# Altium PCB PCB1.PcbDoc
Units mm, origin at the board's own origin, x right, y up, seen from the top; angles counter-clockwise.
Board outline 21.08 x 42.55 mm, 2 copper layers (Top Layer, Bottom Layer); 17 components, 8 nets, 141 pads, 0 vias.
Unrouted connection lines stored in the file: 16.
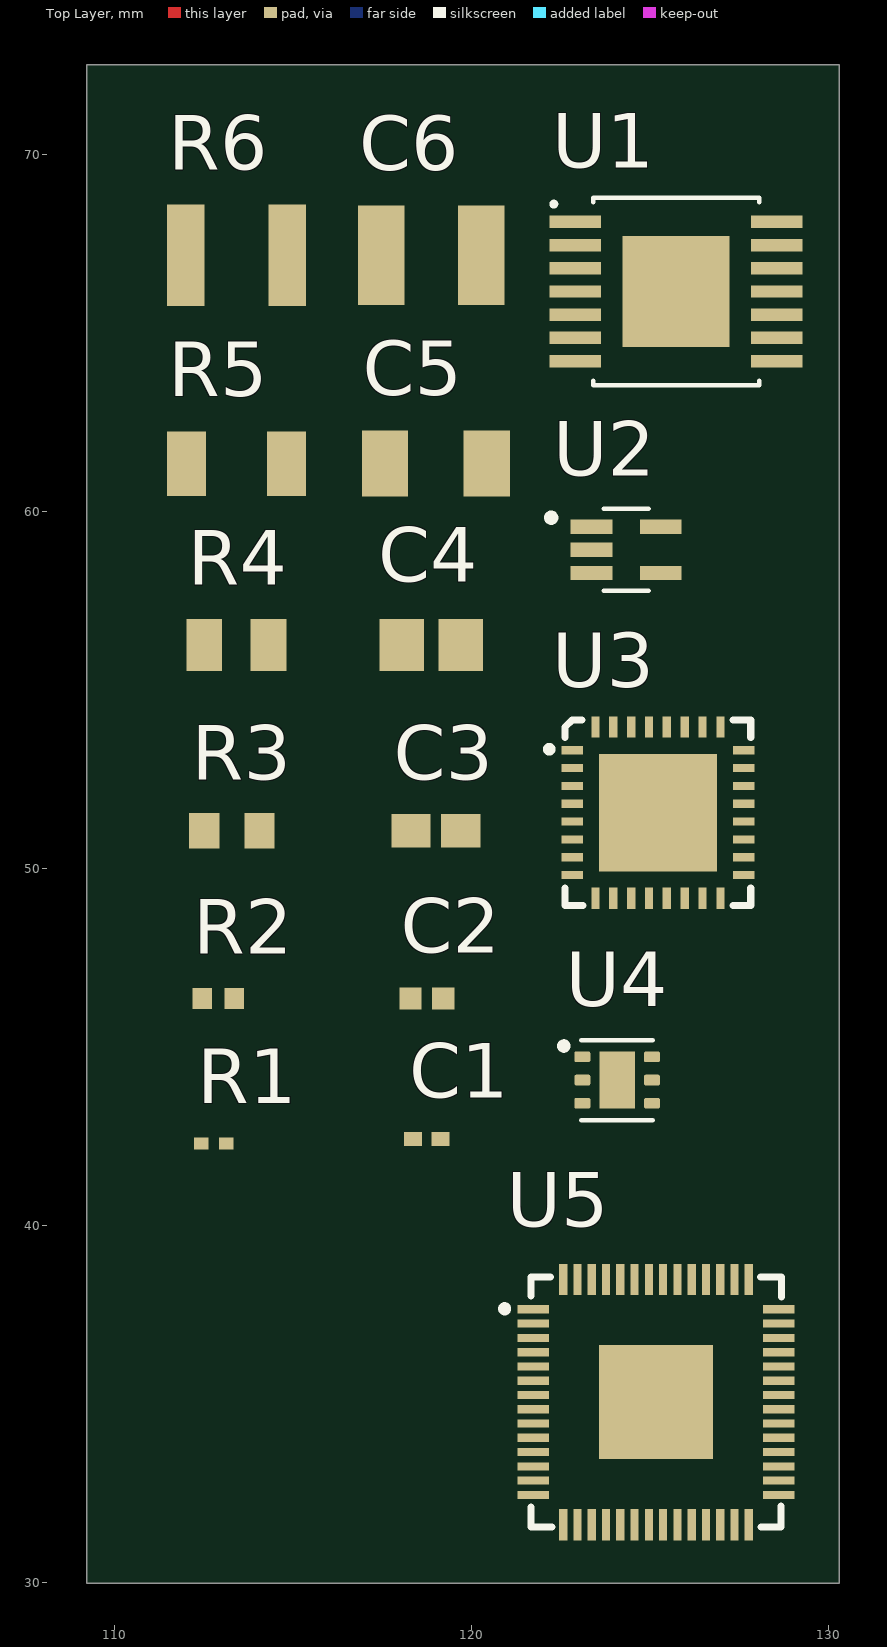
[diagram p0: Top Layer view]
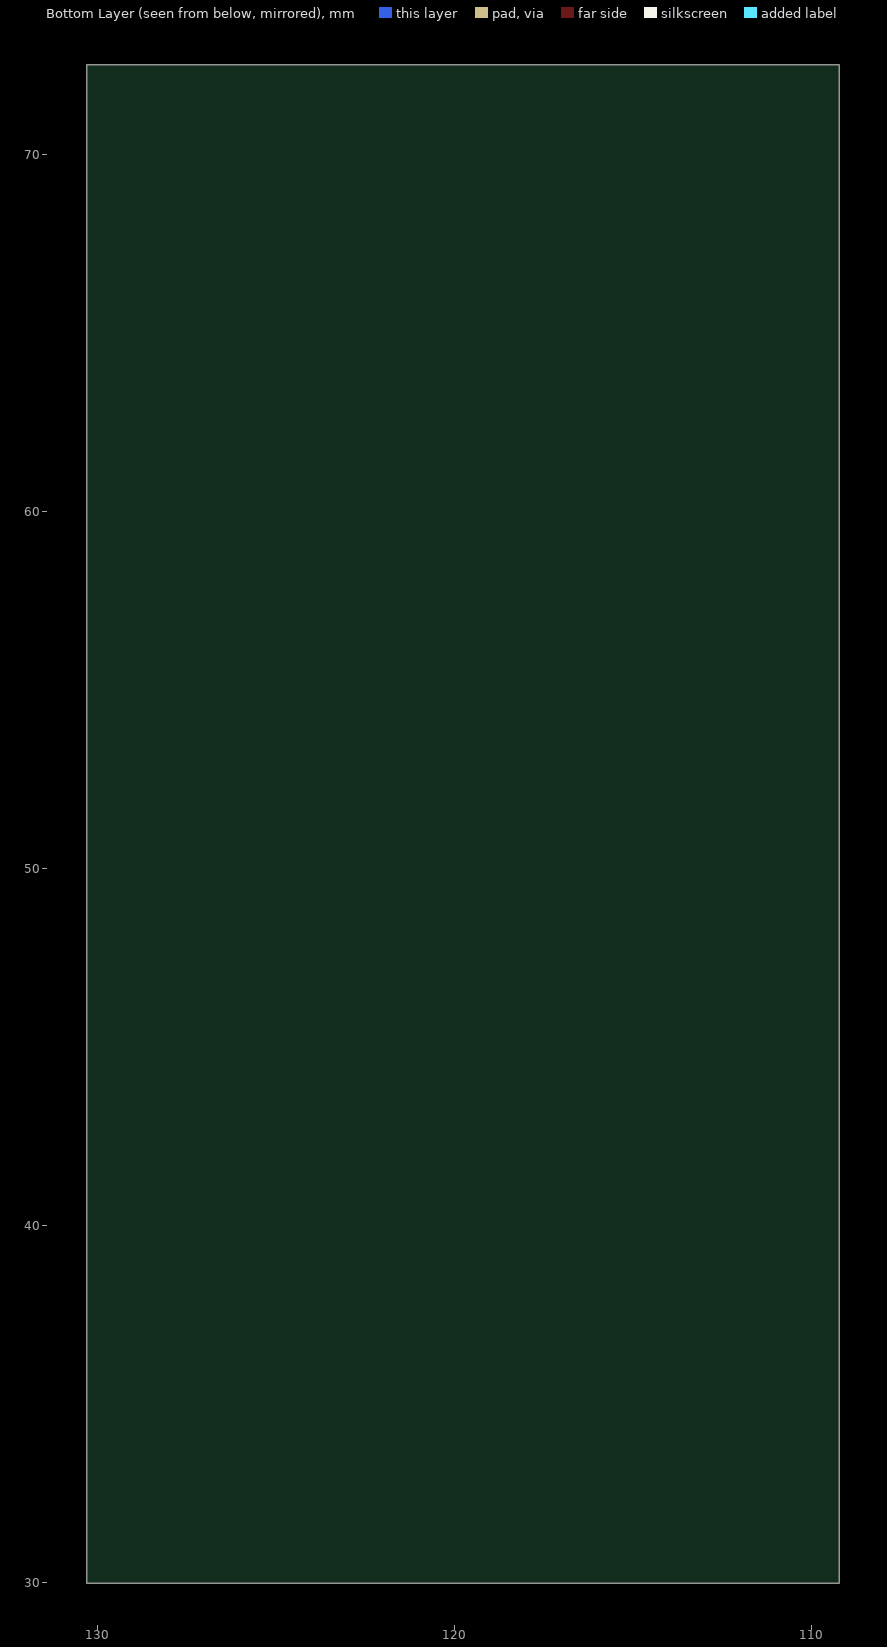
[diagram p1: Bottom Layer view, seen from below]

## Layer stack, top to bottom
Top Solder: solder mask 0.0102, Solder Resist, Dk 3.5
Top Layer: signal copper 0.0356
Dielectric 1: dielectric 0.32, FR-4, Dk 4.8
Bottom Layer: signal copper 0.0356
Bottom Solder: solder mask 0.0102, Solder Resist, Dk 3.5

## Board outline
109.22,29.972 130.302,29.972 130.302,72.517 109.22,72.517

## Design rules (kind name [scope] priority, off if disabled: settings)
Clearance "Stitching No Net" [IsStitchingVia and InNet('No Net') vs (IsVia and (Not IsStitchingVia)) Or IsPad] p1: gap=0.127 ignorepadtopadclearanceinfootprint=FALSE
Clearance [All] p2: gap=0.2 ignorepadtopadclearanceinfootprint=TRUE except(0.102: Arc-Text Track-Text SMDPad-Text THPad-Text Fill-Text Poly-Text Region-Text Text-Text; 0.114: Arc-Arc Arc-Track Arc-SMDPad Arc-Via Track-Track Track-SMDPad Track-Via; 0.127: Via-Text; 0.152: Arc-THPad Track-THPad SMDPad-SMDPad SMDPad-THPad SMDPad-Via THPad-THPad THPad-Via Via-Via; 0.25: Arc-Hole Track-Hole SMDPad-Hole THPad-Hole Via-Hole Fill-Hole Poly-Hole Region-Hole Text-Hole)
ComponentClearance [All] p1: gap=0 collisioncheckmode=3 verticalgap=0 showdistances=FALSE
DiffPairsRouting DIFF90 [InDifferentialPairClass('All Differential Pairs')] p1: maxlimit=0.15 minlimit=0.15 mostfreqgap=0.15 toplayer_minwidth=0.141 toplayer_maxwidth=0.141 toplayer_prefwidth=0.141 bottomlayer_minwidth=0.137 bottomlayer_maxwidth=0.137 bottomlayer_prefwidth=0.137 impedanceprofiledriven=TRUE impedanceprofileid={235DA661-18AF-4E37-B827-B8E0859B5AF9} maxuncoupledlength=12.7
HoleSize [All] p1: absolutevalues=TRUE maxlimit=6.3 minlimit=0.2 maxpercent=80.000 minpercent=20.000
MinimumSolderMaskSliver [All] p1: minsoldermaskwidth=0.08
PlaneConnect [All] p1: pad.planeconnectstyle=Relief pad.reliefexpansion=0.508 pad.reliefentries=4 pad.reliefconductorwidth=0.508 pad.reliefairgap=0.254 via.planeconnectstyle=Direct via.reliefexpansion=0.508 via.reliefentries=4 via.reliefconductorwidth=0.508 via.reliefairgap=0.254
PolygonConnect [All] p1: connectstyle=Direct reliefconductorwidth=0.254 reliefentries=4 polygonreliefangle="90 Angle" airgapwidth=0.254
RoutingVias "General Vias" [All] p1: holewidth=0.2 width=0.45 viastyle="Through Hole" minholewidth=0.2 minwidth=0.45 maxholewidth=0.5 maxwidth=6.3
SilkToSilkClearance [All] p1: silktosilkclearance=0.15
SilkToSolderMaskClearance [IsPad] p1: minsilkscreentomaskgap=0.14 clearancetoexposedcopper=TRUE
SolderMaskExpansion [All] p1: expansion=0.038 istentingtop=FALSE
SupplyNets "Schematic Supply Nets" [InNet('GND')] p1: voltage=0.000
SupplyNets "Schematic Supply Nets_2" [InNet('VCC')] p2: voltage=0.000
UnRoutedNet [All] p1: checkbadconnections=TRUE
Width [All] p1: maxlimit=5 minlimit=0.1 preferedwidth=0.25
22 further rules are at their usual default settings.

## Components (designator, comment, footprint, x,y, rotation, side; value= is the part's Value field where it differs from the comment)
C1 "CAP_0201" CAP_0201 118.745,42.418 r0 top
C2 "CAP_0402" CAP_0402 118.745,46.355 r0 top
C3 "CAP_0603" CAP_0603 118.999,51.054 r0 top
C4 "CAP_0805" CAP_0805 118.872,56.261 r0 top
C5 "CAP_1206" CAP_1206 118.999,61.341 r0 top
C6 "CAP_1210" CAP_1210 118.872,67.183 r0 top
R1 "RES_0201" RES_0201 112.776,42.291 r0 top
R2 "RES_0402" RES_0402 112.903,46.355 r0 top
R3 "RES_0603" RES_0603 113.284,51.054 r0 top
R4 "RES_0805" RES_0805 113.411,56.261 r0 top
R5 "RES_1206" RES_1206 113.411,61.341 r0 top
R6 "RES_1210" RES_1210 113.411,67.183 r0 top
U1 "ISL78420AVEZ" ISL78420AVEZ 125.73,66.167 r0 top
U2 "MIC5365-1.8YC5-TR" MIC5365-1.8YC5-TR 124.333,58.928 r0 top
U3 "ISL6236AIRZ" L32.5X5B 125.222,51.562 r0 top
U4 "TLV75533PDRVR" TLV75533PDRVR 124.079,44.069 r0 top
U5 "RP2040" QFN-56-EP 125.168,35.044 r0 top

## Footprints (in the part's own frame and the unit in brackets; to place one, negate y for a bottom-side part, rotate by r counter-clockwise, add the part's x,y. Pads: shape width x height; smd on the part's side, far side on the other; paste and mask are expansions set on the pad)
CAP_0201 [mm] "Chip Capacitor, 2-Leads, Body 0.60x0.30mm, IPC Medium Density"
  rect 0.5x0.4 smd mask+0.05: 1(-0.386,0) 2(0.386,0)
  body extent -0.32,-0.17 0.32,0.17, height 0.33
CAP_0402 [mm] "Chip Capacitor, 2-Leads, Body 1.00x0.50mm, IPC Medium Density"
  rect 0.62x0.62 smd mask+0.05: 1(-0.46,0) 2(0.46,0)
  body extent -0.53,-0.28 0.53,0.28, height 0.55
CAP_0603 [mm] "Chip Capacitor, 2-Leads, Body 1.60x0.80mm, IPC Medium Density"
  rect 1.1x0.95 smd mask+0.05: 1(-0.7,0) 2(0.7,0)
  body extent -0.85,-0.44 0.85,0.44, height 0.87
CAP_0805 [mm] "Chip Capacitor, 2-Leads, Body 2.00x1.25mm, IPC Medium Density"
  rect 1.25x1.45 smd mask+0.05: 1(-0.825,0) 2(0.825,0)
  body extent -1.05,-0.67 1.05,0.67, height 1.35
CAP_1206 [mm] "Chip Capacitor, 2-Leads, Body 3.20x1.60mm, IPC Medium Density"
  rect 1.3x1.85 smd mask+0.05: 1(-1.425,0) 2(1.425,0)
  body extent -1.68,-0.87 1.68,0.87, height 1.35
CAP_1210 [mm] "Chip Capacitor, 2-Leads, Body 3.20x2.50mm, IPC Medium Density"
  rect 1.3x2.8 smd mask+0.05: 1(-1.4,0) 2(1.4,0)
  body extent -1.7,-1.35 1.7,1.35, height 1.8
ISL78420AVEZ [mm]
  rect 1.45x0.35 smd paste+0 mask+0.05: 1(-2.825,1.95) 2(-2.825,1.3) 3(-2.825,0.65) 4(-2.825,0) 5(-2.825,-0.65) 6(-2.825,-1.3) 7(-2.825,-1.95) 8(2.825,-1.95) 9(2.825,-1.3) 10(2.825,-0.65) 11(2.825,0) 12(2.825,0.65) 13(2.825,1.3) 14(2.825,1.95)
  rect 3x3.1 smd paste+0 mask+0.05: 15(0,0)
  silkscreen extent -3.49,-2.63 2.32,2.63, body extent -3.2,-2.5 3.2,2.5, height 1.2
L32.5X5B [mm]
  rect 0.6x0.23 smd mask+0.05: 1(-2.4,1.75) 2(-2.4,1.25) 3(-2.4,0.75) 4(-2.4,0.25) 5(-2.4,-0.25) 6(-2.4,-0.75) 7(-2.4,-1.25) 8(-2.4,-1.75) 17(2.4,-1.75) 18(2.4,-1.25) 19(2.4,-0.75) 20(2.4,-0.25) 21(2.4,0.25) 22(2.4,0.75) 23(2.4,1.25) 24(2.4,1.75)
  rect 0.23x0.6 smd mask+0.05: 9(-1.75,-2.4) 10(-1.25,-2.4) 11(-0.75,-2.4) 12(-0.25,-2.4) 13(0.25,-2.4) 14(0.75,-2.4) 15(1.25,-2.4) 16(1.75,-2.4) 25(1.75,2.4) 26(1.25,2.4) 27(0.75,2.4) 28(0.25,2.4) 29(-0.25,2.4) 30(-0.75,2.4) 31(-1.25,2.4) 32(-1.75,2.4)
  rect 3.3x3.3 smd mask+0.05: 33(0,0)
  silkscreen extent -3.1,-2.6 2.6,2.6, body extent -2.55,-2.55 2.55,2.55, height 1
MIC5365-1.8YC5-TR [mm]
  rect 1.17x0.4 smd mask+0.05: 1(-0.97,0.65) 2(-0.97,0) 3(-0.97,-0.65) 4(0.97,-0.65) 5(0.97,0.65)
  silkscreen extent -2.2,-1.14 0.63,1.14, body extent -1.05,-1 1.05,1, height 1.1
QFN-56-EP [mm]
  rect 0.875x0.23 smd mask+0.05: 1(-3.437,2.6) 2(-3.437,2.2) 3(-3.437,1.8) 4(-3.437,1.4) 5(-3.437,1) 6(-3.437,0.6) 7(-3.437,0.2) 8(-3.437,-0.2) 9(-3.437,-0.6) 10(-3.437,-1) 11(-3.437,-1.4) 12(-3.437,-1.8) 13(-3.437,-2.2) 14(-3.437,-2.6) 29(3.437,-2.6) 30(3.437,-2.2) 31(3.437,-1.8) 32(3.437,-1.4) 33(3.437,-1) 34(3.437,-0.6) 35(3.437,-0.2) 36(3.437,0.2) 37(3.437,0.6) 38(3.437,1) 39(3.437,1.4) 40(3.437,1.8) 41(3.437,2.2) 42(3.437,2.6)
  rect 0.23x0.875 smd mask+0.05: 15(-2.6,-3.437) 16(-2.2,-3.437) 17(-1.8,-3.437) 18(-1.4,-3.437) 19(-1,-3.437) 20(-0.6,-3.437) 21(-0.2,-3.437) 22(0.2,-3.437) 23(0.6,-3.437) 24(1,-3.437) 25(1.4,-3.437) 26(1.8,-3.437) 27(2.2,-3.437) 28(2.6,-3.437) 43(2.6,3.437) 44(2.2,3.437) 45(1.8,3.437) 46(1.4,3.437) 47(1,3.437) 48(0.6,3.437) 49(0.2,3.437) 50(-0.2,3.437) 51(-0.6,3.437) 52(-1,3.437) 53(-1.4,3.437) 54(-1.8,3.437) 55(-2.2,3.437) 56(-2.6,3.437)
  rect 3.2x3.2 smd mask+0.05: 57(0,0)
  silkscreen extent -4.3,-3.5 3.51,3.51, body extent -3.51,-3.51 3.51,3.51, height 1
RES_0201 [mm] "Chip Resistor, 2-Leads, Body 0.60x0.30mm, IPC Medium Density"
  rect 0.4x0.35 smd mask+0.05: 1(-0.35,0) 2(0.35,0)
  body extent -0.32,-0.17 0.32,0.17, height 0.26
RES_0402 [mm] "Chip Resistor, 2-Leads, Body 1.00x0.50mm, IPC Medium Density"
  rect 0.55x0.6 smd mask+0.05: 1(-0.45,0) 2(0.45,0)
  body extent -0.53,-0.28 0.53,0.28, height 0.4
RES_0603 [mm] "Chip Resistor, 2-Leads, Body 1.60x0.80mm, IPC Medium Density"
  rect 0.85x1 smd mask+0.05: 1(-0.775,0) 2(0.775,0)
  body extent -0.85,-0.45 0.85,0.45, height 0.55
RES_0805 [mm] "Chip Resistor, 2-Leads, Body 2.00x1.25mm, IPC Medium Density"
  rect 1x1.45 smd mask+0.05: 1(-0.9,0) 2(0.9,0)
  body extent -1.05,-0.67 1.05,0.67, height 0.6
RES_1206 [mm] "Chip Resistor, 2-Leads, Body 3.10x1.60mm, IPC Medium Density"
  rect 1.1x1.8 smd mask+0.05: 1(-1.4,0) 2(1.4,0)
  body extent -1.6,-0.85 1.6,0.85, height 0.65
RES_1210 [mm] "Chip Resistor, 2-Leads, Body 3.10x2.60mm, IPC Medium Density"
  rect 1.05x2.85 smd mask+0.05: 1(-1.425,0) 2(1.425,0)
  body extent -1.6,-1.38 1.6,1.38, height 0.65
TLV75533PDRVR [mm]
  rrect35% 0.45x0.3 smd mask+0.05: 1(-0.975,0.65) 2(-0.975,0) 3(-0.975,-0.65) 4(0.975,-0.65) 5(0.975,0) 6(0.975,0.65)
  rect 1x1.6 smd paste-2 mask+0.05: 7(0,0)
  silkscreen extent -1.58,-1.12 1,1.12, body extent -1,-1 1,1, height 0.8

## Part data
C1: "Capacitor SMD 0201 Generic"
C2: "Capacitor SMD 0402 Generic"
C3: "Capacitor SMD 0603 Generic"
C4: "Capacitor SMD 0805 Generic"
C5: "Capacitor SMD 1206 Generic"
C6: "Capacitor SMD 1210 Generic"
R1: "Resistor SMD 0201 Generic"
R2: "Resistor SMD 0402 Generic"
R3: "Resistor SMD 0603 Generic"
R4: "Resistor SMD 0805 Generic"
R5: "Resistor SMD 1206 Generic"
R6: "Resistor SMD 1210 Generic"
U1: "Renesas Electronics 14Pin gate driver module, 100VPower, HTSSOP 16encapsulation", Manufacturer=Renesas, Manufacturer Lifecycle Status=ACTIVE, Max Operating Temperature=125°C, Max Output current=2A, Max Power Dissipation=3.5W, Max Supply Current=4mA, Max Supply Voltage=14V, Min Operating Temperature=-40°C, Min Supply Voltage=8V, Nominal Supply Voltage (DC)=12V, Ratings=AEC-Q100, Category="Gate Drivers", Channel Type=Synchronous, ComponentLink1Description=https://datasheet.octopart.com:443/ISL78420AVEZ-Renesas-datasheet-117116799.pdf?src-supplier=IHS, ComponentLink1URL=https://datasheet.octopart.com:443/ISL78420AVEZ-Renesas-datasheet-117116799.pdf?src-supplier=IHS, ComponentLink2Description=https://datasheet.octopart.com:443/ISL78420AVEZ-Renesas-datasheet-41199385.pdf?src-supplier=IHS, ComponentLink2URL=https://datasheet.octopart.com:443/ISL78420AVEZ-Renesas-datasheet-41199385.pdf?src-supplier=IHS, ComponentLink3Description=https://datasheet.octopart.com:443/ISL78420AVEZ-Renesas-datasheet-179183120.pdf?src-supplier=Integrated+Device+Technology, ComponentLink3URL=https://datasheet.octopart.com:443/ISL78420AVEZ-Renesas-datasheet-179183120.pdf?src-supplier=Integrated+Device+Technology, ComponentLink4Description=https://datasheet.octopart.com:443/ISL78420AVEZ-Renesas-datasheet-149187688.pdf?src-supplier=Integrated+Device+Technology, ComponentLink4URL=https://datasheet.octopart.com:443/ISL78420AVEZ-Renesas-datasheet-149187688.pdf?src-supplier=Integrated+Device+Technology, ComponentLink5Description=https://datasheet.octopart.com:443/ISL78420AVEZ-Intersil-datasheet-37096373.pdf?src-supplier=Newark, ComponentLink5URL=https://datasheet.octopart.com:443/ISL78420AVEZ-Intersil-datasheet-37096373.pdf?src-supplier=Newark, ComponentLink6Description=https://datasheet.octopart.com:443/ISL78420AVEZ-Intersil-datasheet-32868520.pdf?src-supplier=Intersil, ComponentLink6URL=https://datasheet.octopart.com:443/ISL78420AVEZ-Intersil-datasheet-32868520.pdf?src-supplier=Intersil, ComponentLink7Description=http://sigma.octopart.com:80/reach_statement/Renesas-company-45.pdf?src-supplier=Compliance+Statements, ComponentLink7URL=http://sigma.octopart.com:80/reach_statement/Renesas-company-45.pdf?src-supplier=Compliance+Statements, ComponentLink8Description=http://sigma.octopart.com:80/conflict_mineral_statement/Renesas-company-44.pdf?src-supplier=Compliance+Statements, ComponentLink8URL=http://sigma.octopart.com:80/conflict_mineral_statement/Renesas-company-44.pdf?src-supplier=Compliance+Statements, Country of Origin=Malaysia, Export Control Classification Number (ECCN) Code=EAR99, Fall Time=10ns, Harmonized Tariff Schedule (HTS) Code=8540000000, Height=0m, Height - Seated (Max)=1.2mm, Introduction Date=2014-11-06, Length=5mm, Lifecycle Status=Production, Manufacturer Part Number=ISL78420AVEZ, Mounting Technology="Surface Mount", MSL=3, Number of Channels=1, Number of Circuits=1, Number of Drivers=2, Number of Outputs=2, Number of Terminals=14, Output Type=Voltage, Part Family=ISL78420, Pins=14, Pitch=700µm, Pricing="1=1, 10=26.15, 25=24.11, 50=23.06, 100=21.97, 250=20.92, 500=20.03 (EUR)", Propagation Delay=60ns, Radiation Hardening=No, REACH SVHC=Unaffected, RoHS=Compliant, Stock=41, Supplier=Farnell, Supplier Part Number=ISL78420AVEZ, Terminal Pitch=650µm, Width=4.4mm
U2: "Linear Voltage Regulator IC Positive Fixed 1 Output 150mA SC-70-5", Package="SC-70-5 Microchip", Check_prices=https://www.snapeda.com/parts/MIC5365-1.8YC5-TR/Microchip/view-part/?ref=eda, MF=Microchip, MP=MIC5365-1.8YC5-TR, SnapEDA_Link=https://www.snapeda.com/parts/MIC5365-1.8YC5-TR/Microchip/view-part/?ref=snap
U3: "Soft Sw PWM Cntrlr 2-OUT Power Supply Controller 200KHz/300KHz/400KHz/500KHz 32-Pin QFN EP", Case/Package=QFN, Frequency=500kHz, Manufacturer=Renesas, Manufacturer Lifecycle Status=OBSOLETE, Max Junction Temperature (Tj)=150°C, Max Operating Temperature=100°C, Max Output current=3.3A, Max Supply Voltage=25V, Min Input Voltage=5.5V, Min Operating Temperature=-40°C, Min Supply Voltage=4.5V, Min Switching Frequency=25kHz, Nominal Output Voltage=1.05V, Nominal Supply Voltage=12V, Output Current=20A, Supplier Part Number=2627252, Switching Frequency=37kHz, Temperature Grade=Industrial, Category="Voltage Regulators - Switching", ComponentLink1Description=https://datasheet.octopart.com:443/ISL6236AIRZ-Renesas-datasheet-149187364.pdf?src-supplier=Integrated+Device+Technology, ComponentLink1URL=https://datasheet.octopart.com:443/ISL6236AIRZ-Renesas-datasheet-149187364.pdf?src-supplier=Integrated+Device+Technology, ComponentLink2Description=https://datasheet.octopart.com:443/ISL6236AIRZ-Renesas-datasheet-179182849.pdf?src-supplier=Integrated+Device+Technology, ComponentLink2URL=https://datasheet.octopart.com:443/ISL6236AIRZ-Renesas-datasheet-179182849.pdf?src-supplier=Integrated+Device+Technology, ComponentLink3Description=https://datasheet.octopart.com:443/ISL6236AIRZ-Renesas-datasheet-14388266.pdf?src-supplier=IHS, ComponentLink3URL=https://datasheet.octopart.com:443/ISL6236AIRZ-Renesas-datasheet-14388266.pdf?src-supplier=IHS, ComponentLink4Description=https://datasheet.octopart.com:443/ISL6236AIRZ-Renesas-datasheet-138160199.pdf?src-supplier=Future+Electronics, ComponentLink4URL=https://datasheet.octopart.com:443/ISL6236AIRZ-Renesas-datasheet-138160199.pdf?src-supplier=Future+Electronics, ComponentLink5Description=https://datasheet.octopart.com:443/ISL6236AIRZ-Intersil-datasheet-158443858.pdf?src-supplier=Augswan, ComponentLink5URL=https://datasheet.octopart.com:443/ISL6236AIRZ-Intersil-datasheet-158443858.pdf?src-supplier=Augswan, ComponentLink6Description=http://sigma.octopart.com:80/reach_statement/Renesas-company-45.pdf?src-supplier=Compliance+Statements, ComponentLink6URL=http://sigma.octopart.com:80/reach_statement/Renesas-company-45.pdf?src-supplier=Compliance+Statements, ComponentLink7Description=http://sigma.octopart.com:80/conflict_mineral_statement/Renesas-company-44.pdf?src-supplier=Compliance+Statements, ComponentLink7URL=http://sigma.octopart.com:80/conflict_mineral_statement/Renesas-company-44.pdf?src-supplier=Compliance+Statements, Country of Origin=Taiwan, Efficiency=97%, Export Control Classification Number (ECCN) Code=EAR99, Harmonized Tariff Schedule (HTS) Code=8542.39.00.60, Height=900µm, Height - Seated (Max)=1mm, Introduction Date=2017-11-10, Lead Free="Lead Free", Length=5mm, Lifecycle Status=Obsolete, LTB Date=2025-09-04, LTD Date=2026-03-04, Manufacturer Part Number=ISL6236AIRZ, Max Switching Frequency=500kHz, Mounting Technology="Surface Mount", MSL=3, Number of Circuits=1, Number of Outputs=2, Number of Terminals=32, Output Voltage=5.5V, Part Family=ISL6236A, Pins=32, Pitch=500µm, Pricing="1=55.55, 10=50.27, 25=47.72, 120=41.51, 300=39.42 (DKK)", Radiation Hardening=No, REACH SVHC=Unaffected, RoHS=Compliant, Stock=44, Supplier=RS, Terminal Pitch=500µm, Topology="Buck, Push-Pull", Width=5mm
U4: "500mA high-PSRR low-IQ low-dropout voltage regulator with enable 6-WSON -40 to 125", Dropout Voltage=250mV, Manufacturer="Texas Instruments", Manufacturer Lifecycle Status=ACTIVE, Max Junction Temperature (Tj)=125°C, Max Supply Voltage=5.5V, Min Operating Temperature=-40°C, Min Supply Voltage=3.55V, Nominal Supply Current=25µA, Output Current=500mA, Output Voltage=3.3V, Supplier Part Number=296-51807-6-ND, Accuracy=1.5%, Category="LDO Voltage Regulators", ComponentLink1Description=https://octopart.com:443/opatz8j6/c1?t=jz4KQYd-X30Q9oOq83RN8Q7LJxgnjgc-4qjjpnbq5ibPyNQ9C1qmgU9l-Mq4lcrjrxNSMc1fBezVCBvvAiMb2CiEwv4XU2kB3ULQci-AKl7rOna3sWz9khra6j3WMNF6umiBxhVnqs4fyYOWhNE2PFYe70JvyT66uIYe3PcBjJPV9rj2Op8s1nt1envjIjZVUY3LrhuEoL_oMCW_bmLoi1tQcpU6eGEV6lKc3ncBfJmEddXZsDRyU__fld6n-joR3AORBvJ_Vc3OVQhCrkfV5BDSB_Me-qjpyqejgDWvRq9frsyj1H2Z_N5iwNIFVTUaM6S0AsYGC3S5REzTpAfo67I7hxePwPhy6LENuZ1lk9DMUkgUFbrXIbVKEpYMLRYkCMjcSg&src-supplier=Texas+Instruments, ComponentLink1URL=https://octopart.com:443/opatz8j6/c1?t=jz4KQYd-X30Q9oOq83RN8Q7LJxgnjgc-4qjjpnbq5ibPyNQ9C1qmgU9l-Mq4lcrjrxNSMc1fBezVCBvvAiMb2CiEwv4XU2kB3ULQci-AKl7rOna3sWz9khra6j3WMNF6umiBxhVnqs4fyYOWhNE2PFYe70JvyT66uIYe3PcBjJPV9rj2Op8s1nt1envjIjZVUY3LrhuEoL_oMCW_bmLoi1tQcpU6eGEV6lKc3ncBfJmEddXZsDRyU__fld6n-joR3AORBvJ_Vc3OVQhCrkfV5BDSB_Me-qjpyqejgDWvRq9frsyj1H2Z_N5iwNIFVTUaM6S0AsYGC3S5REzTpAfo67I7hxePwPhy6LENuZ1lk9DMUkgUFbrXIbVKEpYMLRYkCMjcSg&src-supplier=Texas+Instruments, ComponentLink2Description=https://sigma.octopart.com:443/101810328/technical_drawing/Texas-Instruments-TLV75533PDRVR.pdf?src-supplier=Texas+Instruments, ComponentLink2URL=https://sigma.octopart.com:443/101810328/technical_drawing/Texas-Instruments-TLV75533PDRVR.pdf?src-supplier=Texas+Instruments, ComponentLink3Description=https://datasheet.octopart.com:443/TLV75533PDRVR-Texas-Instruments-datasheet-148775085.pdf?src-supplier=Upverter, ComponentLink3URL=https://datasheet.octopart.com:443/TLV75533PDRVR-Texas-Instruments-datasheet-148775085.pdf?src-supplier=Upverter, ComponentLink4Description=https://datasheet.octopart.com:443/TLV75533PDRVR-Texas-Instruments-datasheet-150455022.pdf?src-supplier=Augswan, ComponentLink4URL=https://datasheet.octopart.com:443/TLV75533PDRVR-Texas-Instruments-datasheet-150455022.pdf?src-supplier=Augswan, ComponentLink5Description=https://datasheet.octopart.com:443/TLV75533PDRVR-Texas-Instruments-datasheet-165804640.pdf?src-supplier=LCSC, ComponentLink5URL=https://datasheet.octopart.com:443/TLV75533PDRVR-Texas-Instruments-datasheet-165804640.pdf?src-supplier=LCSC, ComponentLink6Description=http://sigma.octopart.com:80/reach_statement/Texas-Instruments-company-64.pdf?src-supplier=Compliance+Statements, ComponentLink6URL=http://sigma.octopart.com:80/reach_statement/Texas-Instruments-company-64.pdf?src-supplier=Compliance+Statements, ComponentLink7Description=http://sigma.octopart.com:80/conflict_mineral_statement/Texas-Instruments-company-63.pdf?src-supplier=Compliance+Statements, ComponentLink7URL=http://sigma.octopart.com:80/conflict_mineral_statement/Texas-Instruments-company-63.pdf?src-supplier=Compliance+Statements, Height=800µm, Length=2mm, Lifecycle Status=Production, Manufacturer Part Number=TLV75533PDRVR, Max Operating Temperature=125°C, Number of Channels=1, Number of Outputs=1, Pins=6, Pricing="1=0.45, 10=0.311, 25=0.2772, 100=0.24, 250=0.22232, 500=0.21166, 1000=0.20288 (USD)", RoHS=Compliant, Schedule B=8542390000, Stock=5358, Supplier=DigiKey, Thickness=750µm, Width=2mm
U5: "Raspberry Pi RP2040 MCU"

## Nets (pads, with @x,y where several pads share a name; then routed paths per layer and width w, separated by ;. In a path a pad name is that pad's centre, name@x,y a point inside that pad or via, vN(x,y) a via of type N, cw(c..) or ccw(c..) an arc to the next point about the centre after c; other vN are vias at no path point)
GND: C1.2 C2.2 C3.2 C4.2 C5.2 C6.2
NetC1_1: C1.1 R1.2
NetC2_1: C2.1 R2.2
NetC3_1: C3.1 R3.2
NetC4_1: C4.1 R4.2
NetC5_1: C5.1 R5.2
NetC6_1: C6.1 R6.2
VCC: R1.1 R2.1 R3.1 R4.1 R5.1 R6.1
pads on no net: U1.1 U1.2 U1.3 U1.4 U1.5 U1.6 U1.7 U1.8 U1.9 U1.10 U1.11 U1.12 U1.13 U1.14 U1.15 U2.1 U2.2 U2.3 U2.4 U2.5 U3.1 U3.2 U3.3 U3.4 U3.5 U3.6 U3.7 U3.8 U3.9 U3.10 U3.11 U3.12 U3.13 U3.14 U3.15 U3.16 U3.17 U3.18 U3.19 U3.20 U3.21 U3.22 U3.23 U3.24 U3.25 U3.26 U3.27 U3.28 U3.29 U3.30 U3.31 U3.32 U3.33 U4.1 U4.2 U4.3 U4.4 U4.5 U4.6 U4.7 U5.1 U5.2 U5.3 U5.4 U5.5 U5.6 U5.7 U5.8 U5.9 U5.10 U5.11 U5.12 U5.13 U5.14 U5.15 U5.16 U5.17 U5.18 U5.19 U5.20 U5.21 U5.22 U5.23 U5.24 U5.25 U5.26 U5.27 U5.28 U5.29 U5.30 U5.31 U5.32 U5.33 U5.34 U5.35 U5.36 U5.37 U5.38 U5.39 U5.40 U5.41 U5.42 U5.43 U5.44 U5.45 U5.46 U5.47 U5.48 U5.49 U5.50 U5.51 U5.52 U5.53 U5.54 U5.55 U5.56 U5.57

## Silkscreen, mask and mechanical layers (free items; w line width, h text height)
Board Shape:
  the board outline again, w0.254